# Altium PCB WX0.009.693PCB.PcbDoc
Units mm, origin at the board's own origin, x right, y up, seen from the top; angles counter-clockwise.
Board outline 117.14 x 52.4 mm, 2 copper layers (Top Layer, Bottom Layer), stack 0.325 mm thick; 30 components, 161 nets, 96 pads, 463 vias.
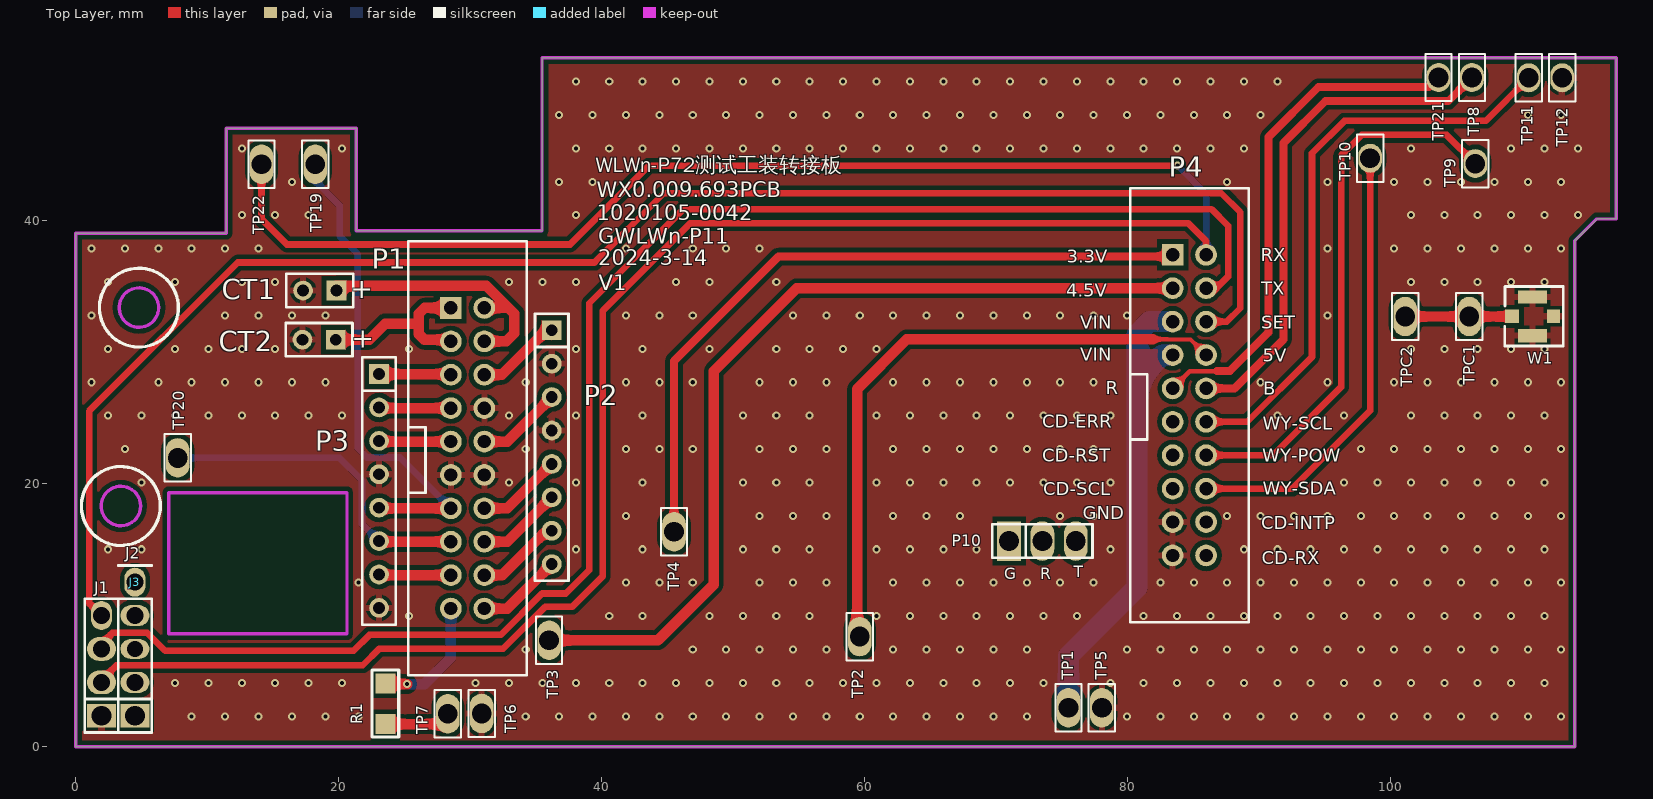
[diagram p0: Top Layer view]
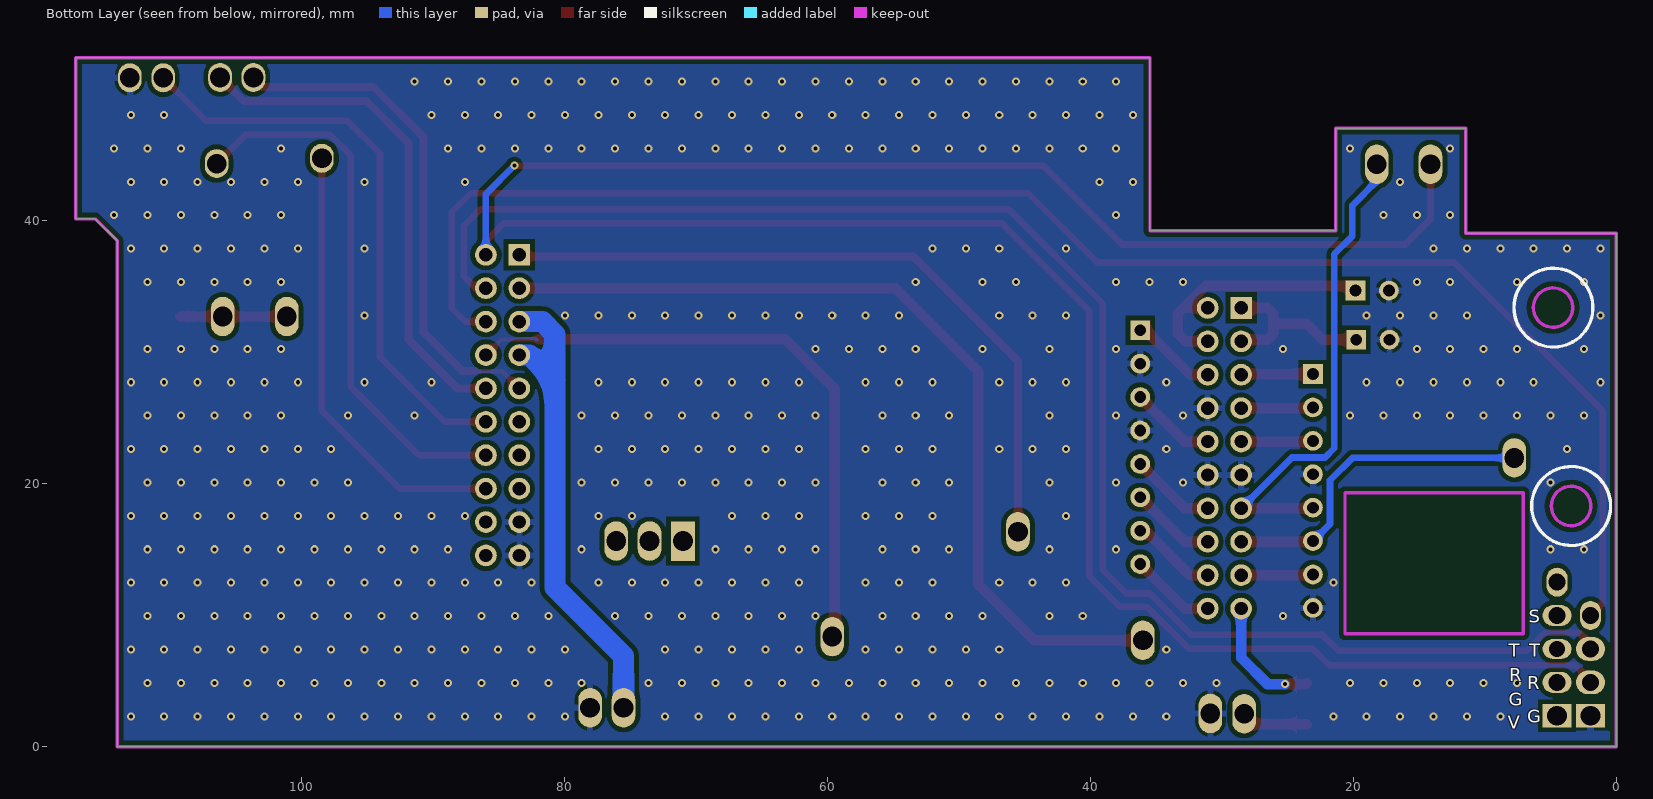
[diagram p1: Bottom Layer view, seen from below]

## Layer stack, top to bottom
Top Solder: solder mask 0.0102, Solder Resist, Dk 3.5
Top Layer: signal copper 0.0356
Dielectric 1: core 0.254, FR-4, Dk 4.2
Bottom Layer: signal copper 0.0356
Bottom Solder: solder mask 0.0102, Solder Resist, Dk 3.5

## Board outline
0,0 0,39.065 11.43,39.065 11.43,47.039 21.334,47.039 21.334,39.243 35.458,39.243 35.458,52.4 117.141,52.4 117.141,40.141 115.656,40.141 113.995,38.481 113.995,0

## Design rules (kind name [scope] priority, off if disabled: settings)
Clearance "Stitching GND" [IsStitchingVia and InNet('GND') vs (IsVia and (Not IsStitchingVia)) Or IsPad] p1: gap=0.127 ignorepadtopadclearanceinfootprint=FALSE except(0: Arc-Hole Track-Hole SMDPad-Hole THPad-Hole Via-Hole Fill-Hole Poly-Hole Region-Hole Text-Hole)
Clearance VIA-VIA [ISVIA vs ISVIA] p2: gap=0.508 ignorepadtopadclearanceinfootprint=FALSE except(0: Arc-Hole Track-Hole SMDPad-Hole THPad-Hole Via-Hole Fill-Hole Poly-Hole Region-Hole Text-Hole)
Clearance VIA-PAD [ISVIA vs ISPAD] p3: gap=0.381 ignorepadtopadclearanceinfootprint=FALSE except(0: Arc-Hole Track-Hole SMDPad-Hole THPad-Hole Via-Hole Fill-Hole Poly-Hole Region-Hole Text-Hole)
Clearance VIA-TRACK [ISVIA vs ISTRACK] p4: gap=0.381 ignorepadtopadclearanceinfootprint=FALSE except(0: Arc-Hole Track-Hole SMDPad-Hole THPad-Hole Via-Hole Fill-Hole Poly-Hole Region-Hole Text-Hole)
Clearance Polygon [InPolygon] p5: gap=0.356 ignorepadtopadclearanceinfootprint=FALSE except(0: Arc-Hole Track-Hole SMDPad-Hole THPad-Hole Via-Hole Fill-Hole Poly-Hole Region-Hole Text-Hole)
Clearance [All] p6: gap=0.191 ignorepadtopadclearanceinfootprint=FALSE except(0: Arc-Hole Track-Hole SMDPad-Hole THPad-Hole Via-Hole Fill-Hole Poly-Hole Region-Hole Text-Hole)
ComponentClearance [All] p1 off: gap=0.254 collisioncheckmode=3 verticalgap=0.254 showdistances=FALSE
FabricationTestPointUsage TestPointUsage [All] p1: valid=0 allowmultiple=FALSE
FabricationTestpoint Testpoint [(IsPad And (OnTopLayer Or OnBottomLayer))] p1: side=3 testpointundercomponent=TRUE minsize=1.016 maxsize=2.54 preferedsize=1.524 minholesize=0 maxholesize=1.016 preferedholesize=0.813 testpointgrid=0.025 allowsidetop=TRUE allowsidebottom=TRUE usegrid=TRUE gridtolerance=0
HoleSize [All] p1: absolutevalues=TRUE maxlimit=12.7 minlimit=0 maxpercent=80.000 minpercent=20.000
HoleToHoleClearance [All] p1: gap=0 allowstackedmicrovias=TRUE
MinimumSolderMaskSliver [All] p1: minsoldermaskwidth=0
NetAntennae [All] p1 off: netantennaetolerance=0
PlaneConnect [InNet('GND')] p1: planeconnectstyle=Relief reliefexpansion=0.508 reliefentries=4 reliefconductorwidth=0.5 reliefairgap=0.254
PolygonConnect Polygon_Via [Isvia] p1: connectstyle=Direct reliefconductorwidth=0.254 reliefentries=4 polygonreliefangle="90 Angle" airgapwidth=0.254
PolygonConnect Polygon_GND [InNet('GND')] p2: connectstyle=Relief reliefconductorwidth=0.5 reliefentries=4 polygonreliefangle="90 Angle" airgapwidth=0.254
PolygonConnect Polygon_all [All] p3: connectstyle=Relief reliefconductorwidth=0.508 reliefentries=4 polygonreliefangle="90 Angle" airgapwidth=0.254
RoutingVias [All] p1: holewidth=0.305 width=0.508 viastyle="Through Hole" minholewidth=0.305 minwidth=0.508 maxholewidth=0.711 maxwidth=1.27
SilkToBoardRegionClearance [All] p1 off:
SilkToSilkClearance [All] p1: silktosilkclearance=0
SilkToSolderMaskClearance SilkscreenOverComponentPads [IsPad] p1: minsilkscreentomaskgap=0 clearancetoexposedcopper=TRUE
SolderMaskExpansion [All] p1: expansion=0.102
Width [All] p1: maxlimit=7.62 minlimit=0.203 preferedwidth=0.203
19 further rules are at their usual default settings.

## Classes and differential pairs
component class WLW-B18-GPRS: TP1 TP3 TP4 TP5 TP6 TP7 TP8 TP21
component class WLW-B18-MCU: 1.5 J1 J2 R62 TP9 TP10 TP11 TP12

## Components (designator, comment, footprint, x,y, rotation, side; value= is the part's Value field where it differs from the comment)
CT1 "BAT" BAT2 18.542,34.696 r180 top
CT2 "BAT" BAT2 18.491,30.963 r180 top
J1 "Header 4" HDR1X4#1 1.956,2.362 r90 top
J2 "HDR254M1X4" HDR1X4#2 4.496,2.362 r90 top
J3 "HDR254M1X4" HDR1X4#3 4.496,4.902 r90 top (schematic designator J2)
P1 "" PHD254_2X10P 29.794,21.946 r0 top
P2 "Header 8" HDR1X8 36.195,31.674 r270 top
P3 "Header 8" HDR1X8 23.063,28.346 r270 top
P4 "" PHD254_2X10P 84.684,25.984 r0 top
P10 "模块调试" PIN254_1*3*WXHJ 76.048,15.646 r0 top locked
R1 "0R" R1206 23.546,3.302 r90 top
TP1 "Test Point" TP5#1 75.489,2.972 r0 top locked
TP2 "Test Point" TP5#1 59.614,8.382 r0 top locked
TP3 "Test Point" TP5#1 35.992,8.103 r0 top locked
TP4 "Test Point" TP5#1 45.492,16.358 r0 top locked
TP5 "Test Point" TP5#1 78.029,2.972 r0 top locked (schematic designator TP17)
TP6 "Test Point" TP5#1 30.861,2.54 r180 top locked (schematic designator TP24)
TP7 "Test Point" TP5#1 28.296,2.515 r0 top locked
TP8 "Test Point" TP5#2 106.172,50.902 r180 top locked
TP9 "Test Point" TP5#2 106.426,44.348 r180 top locked
TP10 "Test Point" TP5#2 98.425,44.755 r0 top locked
TP11 "Test Point" TP5#2 110.49,50.876 r0 top locked
TP12 "Test Point" TP5#2 113.03,50.876 r180 top locked (schematic designator TP23)
TP19 "Test Point" TP5#1 18.212,44.298 r0 top locked (schematic designator TP7)
TP20 "Test Point" TP5#1 7.747,21.971 r0 top locked (schematic designator TP7)
TP21 "Test Point" TP5#2 103.632,50.902 r0 top locked
TP22 "Test Point" TP5#1 14.123,44.298 r0 top locked (schematic designator TP7)
TPC1 "Test Point" TP5#1 105.969,32.723 r0 top locked (schematic designator TP2)
TPC2 "Test Point" TP5#1 101.092,32.723 r0 top locked (schematic designator TP2)
W1 "ANT-IPEX" ANT-IPEX 109.22,32.741 r270 top locked

## Footprints (in the part's own frame and the unit in brackets; to place one, negate y for a bottom-side part, rotate by r counter-clockwise, add the part's x,y. Pads: shape width x height; smd on the part's side, far side on the other; paste and mask are expansions set on the pad)
ANT-IPEX [mm] "IPX天线座"
  rect 1x1.05 smd: 1(0,0)
  rect 1x2.2 smd: 2(-1.475,1.55) 2(1.475,1.55)
  rect 1x1 smd: 2(0,3.151)
  silkscreen extent -2.26,-0.56 2.26,3.9
BAT2 [mm]
  rect 1.5x1.5 hole 0.9: 1(-1.282,0.001)
  round 1.5 hole 0.9: 2(1.258,0.001)
  silkscreen extent -2.55,-1.27 2.53,1.27
HDR1X4#1 [mm] "Connector; Header; 4 Position"
  rect 1.8x2.2 hole 1.5: 1(0,0)
  oval 1.8x2.2 hole 1.3: 2(2.54,0) 3(5.08,0)
  oval 2.2x1.6 hole 1.3: 4(7.62,0)
  silkscreen extent -1.27,-1.27 8.89,1.27, body extent -1.3,-1.3 8.86,1.24, height 8.54
HDR1X4#2 [mm] "Connector; Header; 4 Position"
  rect 1.8x2.2 hole 1.5: 1(0,0)
  oval 1.6x2.2 hole 1.3: 2(2.54,0) 4(7.62,0)
  oval 1.5x2.2 hole 1.2: 3(5.08,0)
  silkscreen extent -1.27,-1.27 8.89,1.27, body extent -1.3,-1.3 8.86,1.24, height 8.54
HDR1X4#3 [mm] "Connector; Header; 4 Position"
  oval 2.2x1.6 hole 1.3: 4(7.62,0)
  silkscreen extent 8.89,-1.27 8.89,1.27, body extent -1.3,-1.3 8.86,1.24, height 8.54
HDR1X8 [mm] "Connector; Header; 8 Position"
  rect 1.5x1.5 hole 0.9: 1(0,0)
  round 1.5 hole 0.9: 2(2.54,0) 3(5.08,0) 4(7.62,0) 5(10.16,0) 6(12.7,0) 7(15.24,0) 8(17.78,0)
  silkscreen extent -1.27,-1.27 19.05,1.27, body extent -1.27,-1.27 19.05,1.27, height 8.54
PHD254_2X10P [mil]
  rect 65x65 hole 40: 1(-50,450)
  round 65 hole 40: 2(50,450) 3(-50,350) 4(50,350) 5(-50,250) 6(50,250) 7(-50,150) 8(50,150) 9(-50,50) 10(50,50) 11(-50,-50) 12(50,-50) 13(-50,-150) 14(50,-150) 15(-50,-250) 16(50,-250) 17(-50,-350) 18(50,-350) 19(-50,-450) 20(50,-450)
  silkscreen extent -177,-650 177,650
PIN254_1*3*WXHJ [mm]
  rect 1.8x3 hole 1.5: 1(-5.08,0)
  oval 1.8x3 hole 1.5: 2(-2.54,0) 3(0,0)
  silkscreen extent -6.35,-1.27 1.27,1.27
R1206 [mil]
  rect 60x60 smd: 1(-62,0) 2(60.05,0)
  silkscreen extent -101,-40 100,40, body extent -102,-29 91,29, height 20
TP5#1 [mm]
  oval 1.8x3 hole 1.5: 1(0,0)
  silkscreen extent -1,-1.8 1,1.8
TP5#2 [mm]
  oval 1.8x2.2 hole 1.5: 1(0,0)
  silkscreen extent -1,-1.8 1,1.8

## Part data
CT1 CT2: "电池"
J1: "Header, 4-Pin"
P1 P4: library part "Header 10X2  PASS", "Header, 10-Pin, Dual row"
P2 P3: "Header, 8-Pin"
P10: library part AD_WXHJ_PinHeader_04, "1*3 ，Φ1.0 ，2.54mm，直脚,无需焊接器件"
R1: library part RES
TP1 TP2 TP3 TP4 TP5 TP6 TP7 TP19 TP20 TP22 TPC1 TPC2: library part "Test Point  PASS", "测试点"
TP8 TP9 TP10 TP11 TP12 TP21: "测试点"
W1: library part 1010902-0053, "IPEX，配GPRS天线转接线"

## Via types
v1: diameter 0.61, hole 0.305, Top Layer to Bottom Layer, tented both sides, 463 vias

## Nets (pads, with @x,y where several pads share a name; then routed paths per layer and width w, separated by ;. In a path a pad name is that pad's centre, name@x,y a point inside that pad or via, vN(x,y) a via of type N, cw(c..) or ccw(c..) an arc to the next point about the centre after c; other vN are vias at no path point)
3.3V: 
3.6V: 
4V: 
5V: 
5V1: P4.8 TP2.1 | length 47.6
  Top Layer w0.3: 81.915,30.988 84.76,30.988 P4.8
  Top Layer w0.8: TP2.1 59.408,8.382 59.408,27.201 63.195,30.988 81.915,30.988
5V2: P4.3 TP3.1 | length 68
  Top Layer w0.8: TP3.1 44.272,8.103 48.514,12.344 48.514,28.575 54.813,34.874 P4.3
119: 
ADC_CTL: 
B: P4.10 TP8.1 | length 38.8
  Top Layer w0.6: P4.10 88.113,27.254 91.834,30.975 91.834,45.91 95.021,49.098 104.369,49.098 TP8.1
BUZZ: 
CARD_CHK_INTP4: P4.18
CARD_ERR: P4.11
CARD_POW: 
CARD_RST: P4.13
CARD_SCL: P4.15
CARD_SDA_RXD3: P4.20
CLOSE: 
COM0: 
COM1: 
COM2: 
COM3: 
ESAM_CLK: 
ESAM_POW: 
ESAM_RST: 
FLASH_CLK: 
FLASH_CS: 
FLASH_CTL: 
FLASH_MISO: 
FLASH_MOSI: 
FLASH_POWER: 
FLASH_WP: 
GD_PWR: 
GND: CT1.2 CT2.2 J1.1 P1.8 P1.11 P1.12 P2.2 P2.4 P3.4 P3.8 P4.17 P4.19 TP5.1 TP6.1 TP12.1 W1.2
  other v1: 8.817,2.324 11.357,2.324 13.897,2.324 16.437,2.324 18.977,2.324 21.517,2.324 34.217,2.324 36.757,2.324 39.297,2.324 41.837,2.324 44.377,2.324 46.917,2.324 49.457,2.324 51.997,2.324 54.537,2.324 57.077,2.324 59.617,2.324 62.157,2.324 64.697,2.324 67.237,2.324 69.777,2.324 72.317,2.324 79.937,2.324 82.477,2.324 85.017,2.324 87.557,2.324 90.097,2.324 92.637,2.324 95.177,2.324 97.717,2.324 100.257,2.324 102.797,2.324 105.337,2.324 107.877,2.324 110.417,2.324 112.957,2.324 7.547,4.864 10.087,4.864 12.627,4.864 15.167,4.864 17.707,4.864 20.247,4.864 30.407,4.864 32.947,4.864 35.487,4.864 38.027,4.864 40.567,4.864 43.107,4.864 45.647,4.864 48.187,4.864 50.727,4.864 53.267,4.864 55.807,4.864 58.347,4.864 60.887,4.864 63.427,4.864 65.967,4.864 68.507,4.864 71.047,4.864 73.587,4.864 78.667,4.864 81.207,4.864 83.747,4.864 86.287,4.864 88.827,4.864 91.367,4.864 93.907,4.864 96.447,4.864 98.987,4.864 101.527,4.864 104.067,4.864 106.607,4.864 109.147,4.864 111.687,4.864 34.217,7.404 46.917,7.404 49.457,7.404 51.997,7.404 54.537,7.404 57.077,7.404 62.157,7.404 64.697,7.404 67.237,7.404 69.777,7.404 72.317,7.404 79.937,7.404 82.477,7.404 85.017,7.404 87.557,7.404 90.097,7.404 92.637,7.404 95.177,7.404 97.717,7.404 100.257,7.404 102.797,7.404 105.337,7.404 107.877,7.404 110.417,7.404 112.957,7.404 25.327,9.944 40.567,9.944 43.107,9.944 48.187,9.944 50.727,9.944 53.267,9.944 55.807,9.944 60.887,9.944 63.427,9.944 65.967,9.944 68.507,9.944 71.047,9.944 73.587,9.944 76.127,9.944 81.207,9.944 83.747,9.944 86.287,9.944 88.827,9.944 91.367,9.944 93.907,9.944 96.447,9.944 98.987,9.944 101.527,9.944 104.067,9.944 106.607,9.944 109.147,9.944 111.687,9.944 21.517,12.484 41.837,12.484 44.377,12.484 46.917,12.484 51.997,12.484 54.537,12.484 57.077,12.484 62.157,12.484 64.697,12.484 67.237,12.484 69.777,12.484 72.317,12.484 74.857,12.484 77.397,12.484 82.477,12.484 85.017,12.484 87.557,12.484 90.097,12.484 92.637,12.484 95.177,12.484 97.717,12.484 100.257,12.484 102.797,12.484 105.337,12.484 107.877,12.484 110.417,12.484 112.957,12.484 2.467,15.024 5.007,15.024 38.027,15.024 43.107,15.024 50.727,15.024 53.267,15.024 55.807,15.024 60.887,15.024 63.427,15.024 65.967,15.024 68.507,15.024 78.667,15.024 88.827,15.024 91.367,15.024 93.907,15.024 96.447,15.024 98.987,15.024 101.527,15.024 104.067,15.024 106.607,15.024 109.147,15.024 111.687,15.024 41.837,17.564 51.997,17.564 54.537,17.564 57.077,17.564 62.157,17.564 64.697,17.564 67.237,17.564 74.857,17.564 77.397,17.564 87.557,17.564 90.097,17.564 92.637,17.564 95.177,17.564 97.717,17.564 100.257,17.564 102.797,17.564 105.337,17.564 107.877,17.564 110.417,17.564 112.957,17.564 5.007,20.104 32.947,20.104 38.027,20.104 43.107,20.104 50.727,20.104 53.267,20.104 55.807,20.104 60.887,20.104 63.427,20.104 65.967,20.104 68.507,20.104 71.047,20.104 73.587,20.104 76.127,20.104 78.667,20.104 96.447,20.104 98.987,20.104 101.527,20.104 104.067,20.104 106.607,20.104 109.147,20.104 111.687,20.104 3.737,22.644 34.217,22.644 41.837,22.644 44.377,22.644 46.917,22.644 51.997,22.644 54.537,22.644 57.077,22.644 62.157,22.644 64.697,22.644 67.237,22.644 69.777,22.644 72.317,22.644 74.857,22.644 77.397,22.644 97.717,22.644 100.257,22.644 102.797,22.644 105.337,22.644 107.877,22.644 110.417,22.644 112.957,22.644 2.467,25.184 5.007,25.184 7.547,25.184 10.087,25.184 12.627,25.184 15.167,25.184 17.707,25.184 20.247,25.184 32.947,25.184 38.027,25.184 43.107,25.184 50.727,25.184 53.267,25.184 55.807,25.184 60.887,25.184 63.427,25.184 65.967,25.184 68.507,25.184 71.047,25.184 73.587,25.184 76.127,25.184 78.667,25.184 91.367,25.184 96.447,25.184 101.527,25.184 104.067,25.184 106.607,25.184 109.147,25.184 111.687,25.184 1.197,27.724 6.277,27.724 8.817,27.724 11.357,27.724 13.897,27.724 16.437,27.724 18.977,27.724 34.217,27.724 41.837,27.724 44.377,27.724 46.917,27.724 51.997,27.724 54.537,27.724 57.077,27.724 62.157,27.724 64.697,27.724 67.237,27.724 69.777,27.724 72.317,27.724 74.857,27.724 77.397,27.724 90.097,27.724 95.177,27.724 100.257,27.724 102.797,27.724 105.337,27.724 107.877,27.724 110.417,27.724 112.957,27.724 2.467,30.264 7.547,30.264 10.087,30.264 12.627,30.264 15.167,30.264 25.327,30.264 38.027,30.264 43.107,30.264 48.187,30.264 53.267,30.264 55.807,30.264 58.347,30.264 60.887,30.264 101.527,30.264 104.067,30.264 106.607,30.264 109.147,30.264 111.687,30.264 1.197,32.804 11.357,32.804 13.897,32.804 16.437,32.804 18.977,32.804 41.837,32.804 44.377,32.804 46.917,32.804 54.537,32.804 57.077,32.804 59.617,32.804 62.157,32.804 64.697,32.804 67.237,32.804 69.777,32.804 72.317,32.804 74.857,32.804 77.397,32.804 79.937,32.804 95.177,32.804 2.467,35.344 7.547,35.344 12.627,35.344 15.167,35.344 32.947,35.344 35.487,35.344 38.027,35.344 45.647,35.344 48.187,35.344 53.267,35.344 101.527,35.344 104.067,35.344 106.607,35.344 109.147,35.344 111.687,35.344 1.197,37.884 3.737,37.884 6.277,37.884 8.817,37.884 11.357,37.884 13.897,37.884 41.837,37.884 46.917,37.884 49.457,37.884 51.997,37.884 95.177,37.884 100.257,37.884 102.797,37.884 105.337,37.884 107.877,37.884 110.417,37.884 112.957,37.884 12.627,40.424 15.167,40.424 17.707,40.424 38.027,40.424 101.527,40.424 104.067,40.424 106.607,40.424 109.147,40.424 111.687,40.424 114.227,40.424 16.437,42.964 36.757,42.964 39.297,42.964 87.557,42.964 95.177,42.964 100.257,42.964 102.797,42.964 105.337,42.964 107.877,42.964 110.417,42.964 112.957,42.964 12.627,45.504 20.247,45.504 38.027,45.504 40.567,45.504 43.107,45.504 45.647,45.504 48.187,45.504 50.727,45.504 53.267,45.504 55.807,45.504 58.347,45.504 60.887,45.504 63.427,45.504 65.967,45.504 68.507,45.504 71.047,45.504 73.587,45.504 76.127,45.504 78.667,45.504 81.207,45.504 83.747,45.504 86.287,45.504 88.827,45.504 101.527,45.504 109.147,45.504 111.687,45.504 114.227,45.504 36.757,48.044 39.297,48.044 41.837,48.044 44.377,48.044 46.917,48.044 49.457,48.044 51.997,48.044 54.537,48.044 57.077,48.044 59.617,48.044 62.157,48.044 64.697,48.044 67.237,48.044 69.777,48.044 72.317,48.044 74.857,48.044 77.397,48.044 79.937,48.044 82.477,48.044 85.017,48.044 87.557,48.044 90.097,48.044 110.417,48.044 112.957,48.044 38.027,50.584 40.567,50.584 43.107,50.584 45.647,50.584 48.187,50.584 50.727,50.584 53.267,50.584 55.807,50.584 58.347,50.584 60.887,50.584 63.427,50.584 65.967,50.584 68.507,50.584 71.047,50.584 73.587,50.584 76.127,50.584 78.667,50.584 81.207,50.584 83.747,50.584 86.287,50.584 88.827,50.584 91.367,50.584
GPRS_POWER: 
GPRS_PWRKEY: 
HALL1_INTP6: 
HALL1_PWR: CT1.1 P1.2 P1.4 | length 20.6
  Top Layer w0.8: CT1.1 19.824,35.052 31.217,35.052 32.893,33.376 ; P1.4 32.741,30.836 33.35,31.445 33.35,32.918 32.893,33.376 ; P1.2 32.893,33.376
HALL2_INTP7: 
HALL2_PWR: CT2.1 P1.1 P1.3 | length 13.6
  Top Layer w0.8: CT2.1 22.325,30.961 23.546,32.182 26.086,32.182 ; P1.3 28.399,30.961 26.518,30.961 26.086,31.393 26.086,32.182 ; P1.1 26.543,33.376 26.086,32.918 26.086,32.182
IRDA_CTL: 
IRDA_POW: 
IRDA_RXD2: 
IRDA_TXD2: 
KEY_INTP0: 
LED: 
LV1: 
LV2: 
M_POWER: 
NC1: 
NC2: 
NetB1_1: TPC1.1 TPC2.1 W1.1 | length 8.2
  Top Layer w0.762: TPC2.1 TPC1.1 107.805,32.723 ; 107.823,32.741 107.805,32.723 ; W1.1 109.202,32.723 107.805,32.723
NetB1_2: 
NetC1_1: 
NetC2_1: 
NetC7_2: 
NetC8_2: 
NetC13_1: 
NetC32_1: 
NetC38_2: 
NetC41_2: 
NetD1_2: 
NetD4_1: 
NetD5_2: 
NetD6_1: 
NetD10_2: 
NetJ1_2: 
NetJ1_3: 
NetJ1_4: 
NetP1_5: P1.5 P3.1 | length 5.5
  Top Layer w0.8: P3.1 28.473,28.346 P1.5
NetP1_6: P1.6 P2.1 | length 6.5
  Top Layer w0.8: P1.6 32.385,28.296 35.763,31.674 P2.1
NetP1_7: P1.7 P3.2 | length 5.5
  Top Layer w0.8: P3.2 23.114,25.756 P1.7
NetP1_9: P1.9 P3.3 | length 5.5
  Top Layer w0.8: P3.3 23.114,23.216 P1.9
NetP1_10: P1.10 P2.3 | length 6.5
  Top Layer w0.8: P1.10 32.817,23.216 P2.3
NetP1_13: P1.13 P3.5 TP19.1 | length 37.4
  Top Layer w0.8: P3.5 23.114,18.136 P1.13
  Bottom Layer w0.508: TP19.1 18.212,43.027 20.066,41.173 20.066,38.837 21.438,37.465 21.438,22.708 22.149,21.996 24.663,21.996 P1.13
NetP1_14: P1.14 P2.5 | length 6.5
  Top Layer w0.8: P1.14 32.817,18.136 P2.5
NetP1_15: P1.15 P3.6 TP20.1 | length 25.4
  Top Layer w0.8: P3.6 23.114,15.596 P1.15
  Bottom Layer w0.508: TP20.1 20.066,21.971 21.768,20.269 21.768,16.942 P3.6
NetP1_16: P1.16 P2.6 | length 6.5
  Top Layer w0.8: P1.16 32.817,15.596 P2.6
NetP1_17: P1.17 P3.7 | length 5.4
  Top Layer w0.8: P3.7@23.114,13.056 P1.17
NetP1_18: P1.18 P2.7 | length 6.5
  Top Layer w0.8: P1.18 32.41,13.056 35.789,16.434 P2.7
NetP1_19: P1.19 R1.2 | length 9.6
  Top Layer w0.8: R1.2 23.598,4.775 v1(25.197,4.775) ; P1.19 P1.19@28.575,10.465
  Bottom Layer w0.8: v1(25.197,4.775) 26.518,4.775 28.524,6.782 P1.19
NetP1_20: P1.20 P2.8 | length 6.5
  Top Layer w0.8: P1.20 32.817,10.516 P2.8
NetP9_1: 
NetP10_1: 
NetQ1_B: 
NetQ1_C: 
NetQ2_B: 
NetQ3_B: 
NetQ3_C: 
NetQ4_G: 
NetQ5_B: 
NetQ5_C: 
NetQ6_B: 
NetQ6_C: 
NetQ7_B: 
NetQ8_B: 
NetQ9_B: 
NetQ9_E: 
NetQ11_B: 
NetQ12_B: 
NetQ13_B: 
NetQ13_C: 
NetQ14_B: 
NetR1_1: R1.1 TP7.1 | length 5.1
  Top Layer w0.8: R1.1 27.509,1.727 TP7.1
NetR1_2: 
NetR4_2: 
NetR5_1: 
NetR6_1: 
NetR7_2: 
NetR15_1: 
NetR50_1: 
OPEN: 
PWRKEY: 
R: P4.9 TP21.1 | length 38.7
  Top Layer w0.35: P4.9 84.709,28.55 86.766,28.55 86.792,28.575
  Top Layer w0.6: 86.792,28.575 87.757,28.575 90.703,31.521 90.703,46.38 94.488,50.165 102.896,50.165 TP21.1
R1: 
RST: J2.3
RTC: P4.1 TP4.1 | length 54.2
  Top Layer w0.6: TP4.1 45.492,29.337 53.442,37.287 83.287,37.287 P4.1
RXD0: 
RXD1: J1.2 P4.2 TP22.1 | length 196.8
  Top Layer w0.5: J1.2 1.956,5.055 3.099,6.198 21.819,6.198 23.089,7.468 32.512,7.468 35.687,10.643 37.744,10.643 40.081,12.979 40.081,33.172 46.736,39.827 84.582,39.827 85.954,38.456 P4.2 ; TP22.1 14.123,40.132 16.053,38.202 37.592,38.202 43.586,44.196 v1(83.795,44.196)
  Bottom Layer w0.5: v1(83.795,44.196) 85.954,42.037 P4.2
S0: 
S1: 
S2: 
S3: 
S4: 
S5: 
S6: 
S7: 
S8: 
S9: 
S10: 
S11: 
S12: 
S13: 
S14: 
S15: 
S16: 
S17: 
S18: 
S19: 
S20: 
SET: J1.4 P4.6 | length 121.3
  Top Layer w0.5: J1.4 1.016,10.922 1.016,25.527 12.319,36.83 39.446,36.83 44.719,42.103 87.107,42.103 88.544,40.665 88.544,33.35 87.528,32.334 P4.6
SIM_CLK: 
SIM_DATA: 
SIM_RST: 
SLEEP: 
TIANXIAN: 
TOOL0: J2.4
TXD0: 
TXD1: J1.3 P4.4 | length 119.2
  Top Layer w0.5: J1.3 1.956,7.823 2.794,8.661 5.436,8.661 6.794,7.302 21.12,7.302 22.327,8.509 32.309,8.509 35.458,11.659 37.262,11.659 39.04,13.437 39.04,33.731 46.203,40.894 86.36,40.894 87.63,39.624 87.63,35.763 86.741,34.874 P4.4
TXD3: 
USIM_GND: 
USIM_VDD: 
VI: P4.5 P4.7 TP1.1 | length 37.2
  Bottom Layer w1.6: TP1.1 75.489,6.909 80.696,12.116 80.696,27.864 ; P4.7 82.626,29.794 80.696,27.864 ; P4.5 81.661,32.334 80.696,31.369 80.696,27.864
VIN: 
VIN_ADC: 
WY_POW: P4.14 TP9.1 | length 41.8
  Top Layer w0.5: P4.14 91.034,22.174 96.215,27.356 96.215,44.958 97.79,46.533 104.242,46.533 TP9.1
WY_SCL: P4.12 TP11.1 | length 44.4
  Top Layer w0.5: P4.12 89.078,24.714 94.005,29.642 94.005,45.136 96.469,47.6 107.214,47.6 TP11.1
WY_SDA: P4.16 TP10.1 | length 34.1
  Top Layer w0.5: P4.16 92.507,19.634 98.425,25.553 TP10.1
X1: 
X2: 
XT1: 
XT2: 
pads on no net: J2.1 J2.2 J3.4 P10.1 P10.2 P10.3

## Polygon pours and split planes (outlines as drawn)
GND on Top Layer "Bottom Layer-No Net" (solid, remove dead copper, pour order 4): 0,56.206 117.141,56.206 117.141,0.182 117.141,0 0,0
GND on Bottom Layer "Bottom Layer-No Net" (solid, remove dead copper, pour order 7): 117.145,0 117.141,56.206 0,56.21 0,0

## Keep-outs
Keep-Out Layer:
  circle w0.254: c3.429,18.313 r1.5
  circle w0.254: c4.801,33.401 r1.5
  lines w0.254: 0,0 113.995,0 113.995,38.481 115.656,40.141 117.141,40.141 117.141,52.4 35.458,52.4 35.458,39.243 21.334,39.243 21.334,47.039 11.43,47.039 11.43,39.065 0,39.065 0,0 ; 7.061,8.611 20.625,8.611 20.625,19.329 7.061,19.329 7.061,8.611

## Silkscreen, mask and mechanical layers (free items; w line width, h text height)
Top Overlay:
  circle w0.254: c3.429,18.313 r3
  circle w0.254: c4.801,33.401 r3
  text "WLWn-P72测试工装转接板" at 39.546,43.307 h2
  text "WX0.009.693PCB" at 39.599,41.427 h2
  text "1020105-0042" at 39.624,39.675 h2
  text "GWLWn-P11" at 39.726,37.871 h2
  text "RX" at 90.094,36.906 h1
  text "3.3V" at 75.362,36.805 h1
  text "2024-3-14" at 39.726,36.246 h2
  text "TX" at 90.145,34.366 h1
  text "V1" at 39.751,34.341 h2
  text "4.5V" at 75.336,34.214 h1
  text "SET" at 90.145,31.801 h1
  text "VIN" at 76.378,31.775 h1
  text "VIN" at 76.378,29.362 h1
  text "5V" at 90.272,29.286 h1
  text "R" at 78.308,26.797 h1
  text "B" at 90.297,26.772 h1
  text "CD-ERR" at 73.482,24.282 h1
  text "WY-SCL" at 90.272,24.105 h1
  text "CD-RST" at 73.482,21.692 h1
  text "WY-POW" at 90.221,21.666 h1
  text "WY-SDA" at 90.246,19.152 h1
  text "CD-SCL" at 73.558,19.126 h1
  text "GND" at 76.581,17.297 h1
  text "CD-INTP" at 90.145,16.535 h1
  text "CD-RX" at 90.17,13.894 h1
  text "T" at 75.895,12.903 h0.86
  text "G" at 70.587,12.725 h0.86
  text "R" at 73.355,12.725 h0.86
Bottom Overlay:
  circle w0.254: c3.429,18.313 r3
  circle w0.254: c4.775,33.401 r3
  text "S" at 6.655,9.423 h1
  text "T" at 8.179,6.858 h1
  text "T" at 6.629,6.833 h1
  text "R" at 8.128,4.978 h1
  text "R" at 6.754,4.364 h1
  text "G" at 8.153,3.124 h1
  text "G" at 6.754,1.829 h1
  text "V" at 8.23,1.372 h1

## Text inside footprints (layer, text, board x,y; h text height)
CT1: Top Overlay "+" at 22.606,35.408 h1.5 r180
CT2: Top Overlay "+" at 22.682,31.648 h1.5 r180